# Altium PCB Smart_water_dispenser.PcbDoc
Units mil, origin at the board's own origin, x right, y up, seen from the top; angles counter-clockwise.
Board outline 3966.36 x 2750.41 mil, 2 copper layers (Top Layer, Bottom Layer); 54 components, 41 nets, 185 pads, 16 vias.
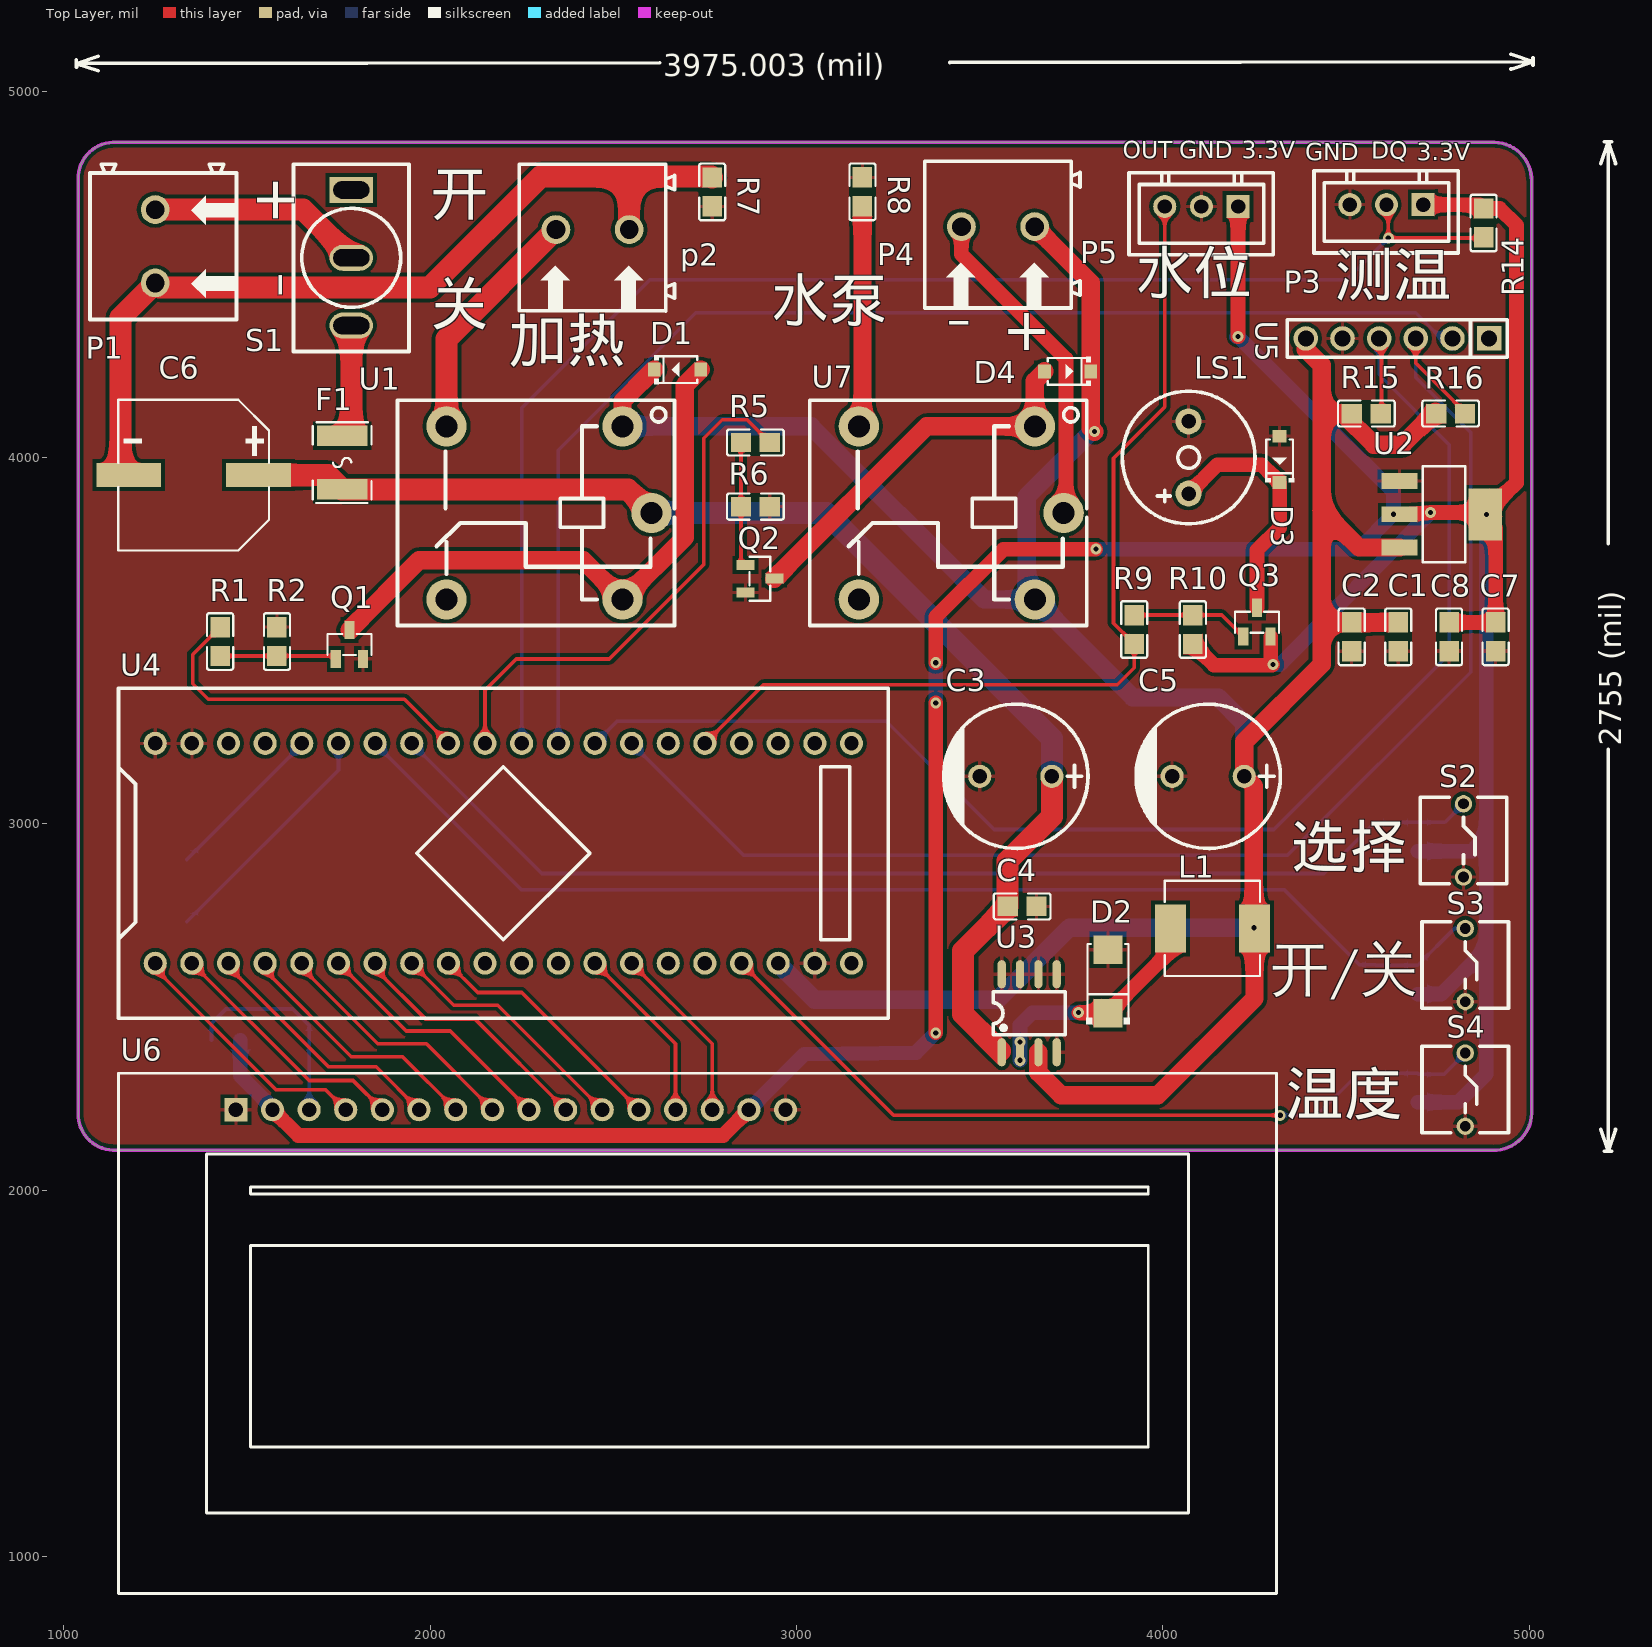
[diagram p0: Top Layer view]
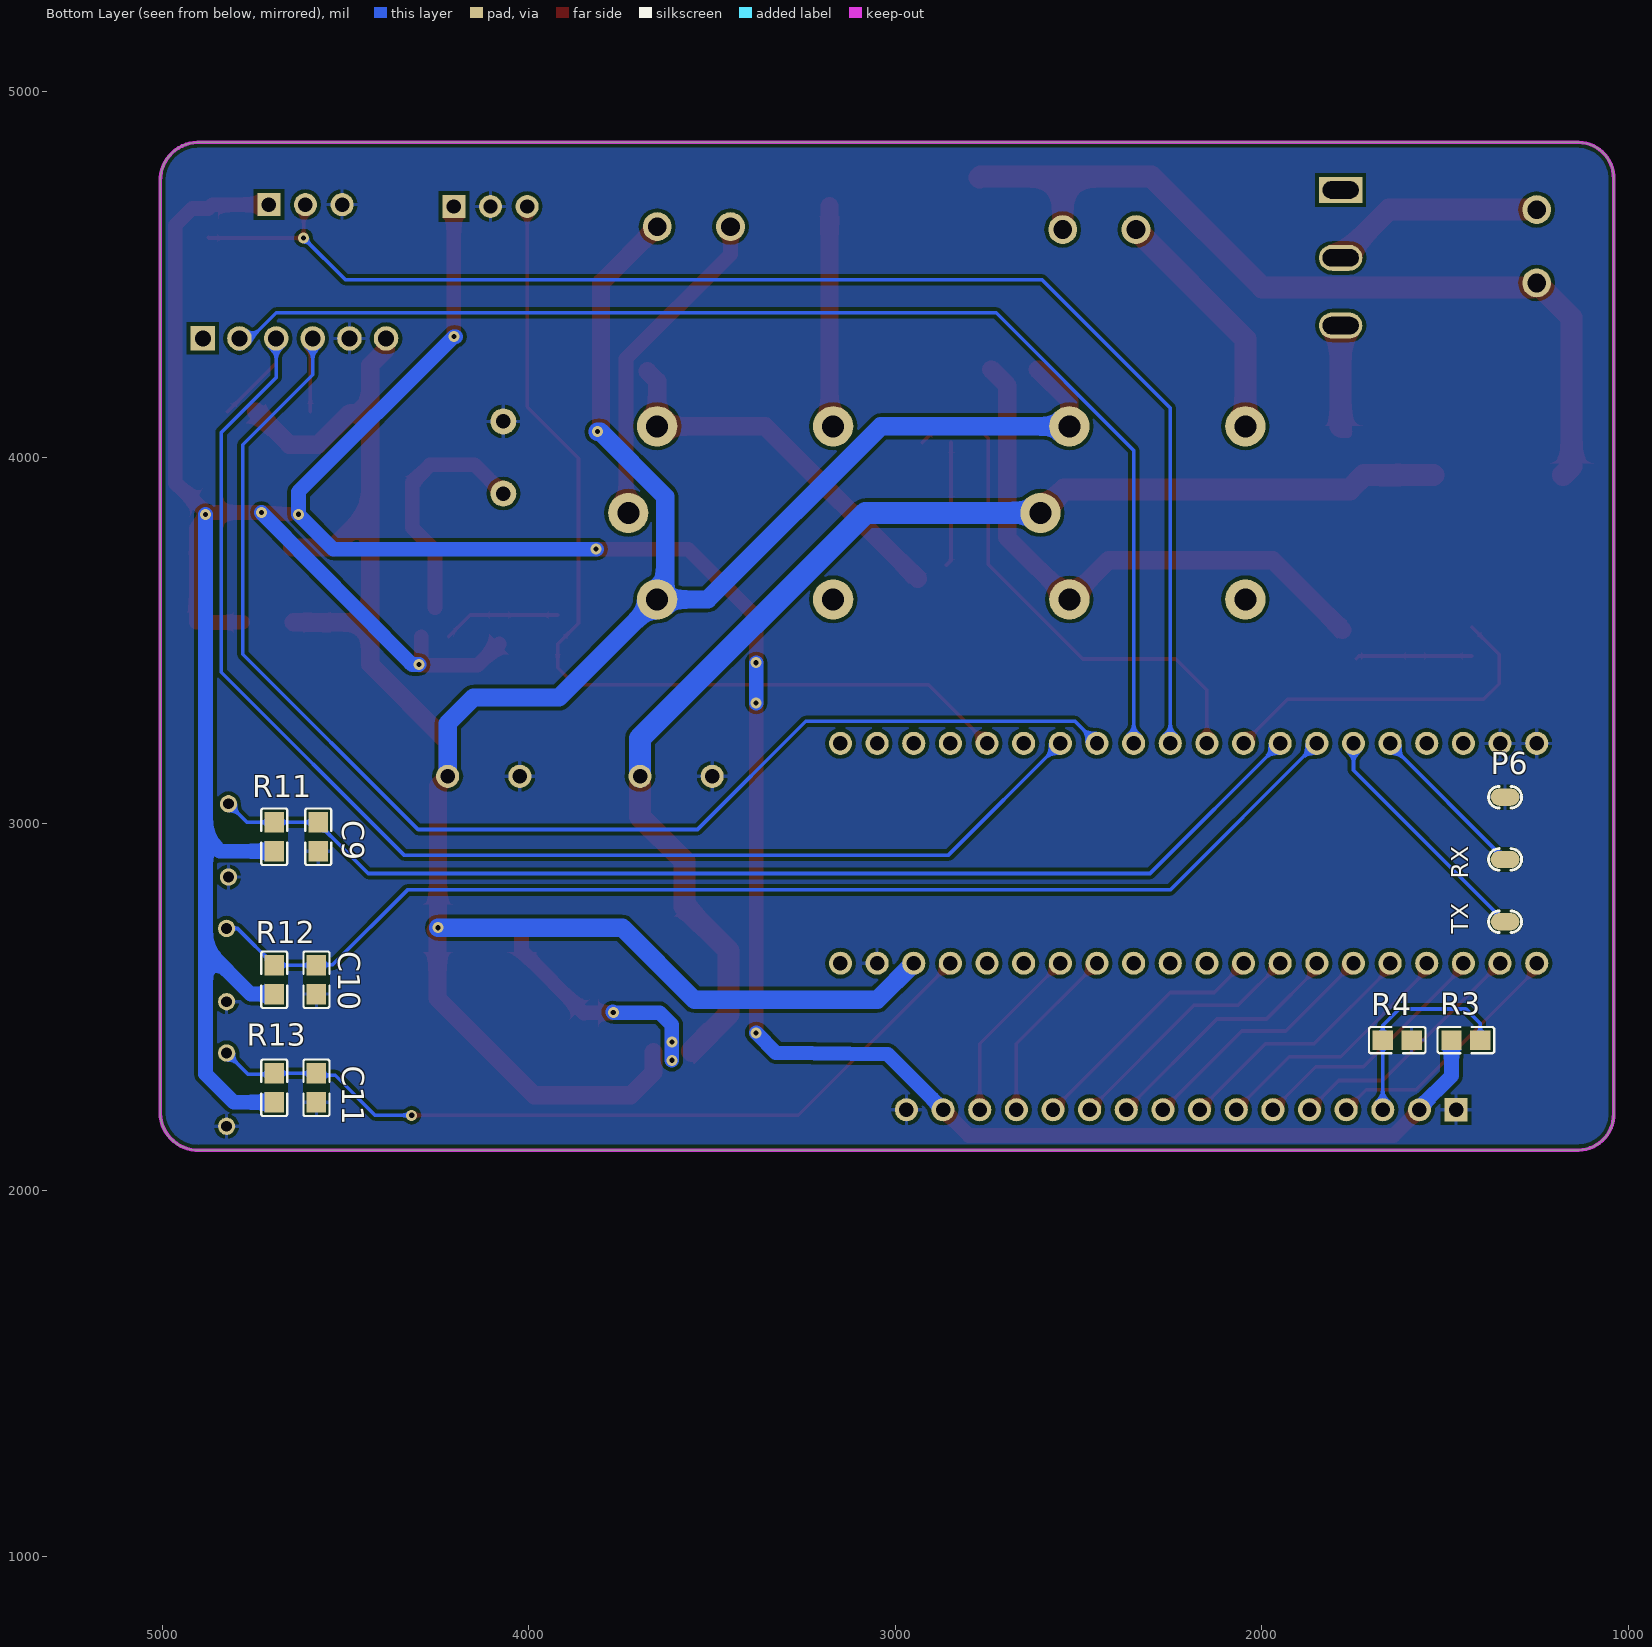
[diagram p1: Bottom Layer view, seen from below]

## Layer stack, top to bottom
Top Solder: solder mask 0.4, Solder Resist, Dk 3.5
Top Layer: signal copper 1.4
Dielectric 1: dielectric 12.6, FR-4, Dk 4.8
Bottom Layer: signal copper 1.4
Bottom Solder: solder mask 0.4, Solder Resist, Dk 3.5

## Board outline
1135,2110 cw(c1137.5,2207.5) 1040,2210 1040,4760 cw(c1137.5,4762.5) 1135,4860 4905,4860 cw(c4902.34,4756.31) 5006.04,4753.65 5006.35,4753.65 5006.35,2210.63 cw(c4902.66,2213.29) 4900,2109.59 4900,2110

## Design rules (kind name [scope] priority, off if disabled: settings)
Clearance [All] p1: gap=10 ignorepadtopadclearanceinfootprint=FALSE except(0: Arc-Hole Track-Hole SMDPad-Hole THPad-Hole Via-Hole Fill-Hole Poly-Hole Region-Hole Text-Hole)
PolygonConnect [All] p1: connectstyle=Relief reliefconductorwidth=10 reliefentries=4 polygonreliefangle="90 Angle" airgapwidth=10
RoutingVias [All] p1: holewidth=28 width=50 viastyle="Through Hole" minholewidth=28 minwidth=50 maxholewidth=28 maxwidth=50
SolderMaskExpansion [All] p1: expansion=4
Width [All] p1: maxlimit=100 minlimit=10 preferedwidth=10
30 further rules are at their usual default settings.

## Components (designator, comment, footprint, x,y, rotation, side; value= is the part's Value field where it differs from the comment)
C1 "Cap" 0805 4642.15,3510.63 r90 top value=10uF
C2 "Cap" 0805 4515,3510.63 r270 top value=0.1uF
C3 "Cap" CAP_TH_BD10 3600,3130 r180 top value=470uF
C4 "Cap" 0805 3615.63,2775 r180 top value=1uF
C5 "Cap" CAP_TH_BD10 4125,3130 r180 top value=180uF
C6 "Cap Pol1" cap_1000uF 1355,3952.13 r180 top value=1000uF
C7 "Cap" 0805 4907.85,3510.63 r270 top value=10uF
C8 "Cap" 0805 4780.7,3510.63 r270 top value=0.1uF
C9 "Cap" 0805 4575,2965 r90 bottom value=100nF
C10 "Cap" 0805 4580,2575 r90 bottom value=100nF
C11 "Cap" 0805 4580,2280 r90 bottom value=100nF
D1 "1N4148" 1N4148 2675,4240 r180 top
D2 "B340A" B340A 3850,2570 r90 top
D3 "1N4148" 1N4148 4318.47,3995 r270 top
D4 "1N4148" 1N4148 3740,4235 r0 top
F1 "Fuse 2" F1812 1760,3984.25 r90 top
L1 "Inductor" IND_CD54 4160,2700 r0 top value=68uH
LS1 "Speaker" buzzer 4070,4000 r90 top
P1 "12V_Terminal Blocks" 2PIN 1250,4576.42 r270 top
p2 "heater" 2PIN 2443.4,4621.99 r180 top
P3 "DS18B20" DS18B20 4610,4690 r180 top
P4 "PUMP" 2PIN 3550,4630 r180 top
P5 "level" DS18B20 4105,4685 r180 top
P6 "DEBUG_UART" DEBUG_UART 1335,2905 r90 bottom
Q1 "S8050" S8050 1780,3490 r270 top
Q2 "S8050" S8050 2900.04,3669.3 r180 top
Q3 "S8550" S8050 4256.54,3550.63 r270 top
R1 "Res2" 0805 1427.12,3497.81 r270 top value=1K
R2 "Res2" 0805 1582.12,3497.81 r270 top value=4.7K
R3 "Res2" 0805 1443.11,2410 r0 bottom value=5K
R4 "Res2" 0805 1630.63,2410 r0 bottom value=5K
R5 "Res2" 0805 2887.71,4040.95 r180 top value=1K
R6 "Res2" 0805 2887.71,3865.95 r180 top value=4.7K
R7 "Res2" 0805 2770,4724.73 r270 top value=0ohm
R8 "Res2" 0805 3180,4725 r90 top value=0ohm
R9 "Res2" 0805 3921.54,3530.63 r90 top value=1K
R10 "Res2" 0805 4081.54,3530.63 r90 top value=4.7K
R11 "Res2" 0805 4695,2965 r90 bottom value=4.7k
R12 "Res2" 0805 4695,2575 r90 bottom value=4.7k
R13 "Res2" 0805 4695,2280 r90 bottom value=4.7k
R14 "Res2" 0805 4875,4640 r90 top value=4.7K
R15 "Res2" 0805 4555,4120 r180 top value=4.7K
R16 "Res2" 0805 4785,4120 r180 top value=4.7K
S1 "SW-SPDT" SW 1785,4545 r270 top
S2 "SW-PB" SW2 4820,2955 r90 top
S3 "SW-PB" SW2 4825,2615 r90 top
S4 "SW-PB" SW2 4825,2275 r90 top
U1 "RELAY_12V" RELAY 2300,3870 r180 top
U2 "AMS1117_3.3" AMS1117 4762.83,3845 r180 top
U3 "XL1509_5.0" XL1509_5.0 3635,2483.5 r0 top
U4 "STM32" STM32 2215,2935 r0 top
U5 "ESP8266" ESP8266 4640,4325 r180 top
U6 "LCD1602" LCD1602 2626.22,1594.51 r0 top
U7 "RELAY_5V" RELAY 3425,3870 r180 top

## Footprints (in the part's own frame and the unit in brackets; to place one, negate y for a bottom-side part, rotate by r counter-clockwise, add the part's x,y. Pads: shape width x height; smd on the part's side, far side on the other; paste and mask are expansions set on the pad)
1N4148 [mm]
  rect 0.88x0.96 smd: 1(-1.61,0) 2(1.61,0)
  silkscreen extent -1.38,-1 1.6,1
2PIN [mm]
  round 2 hole 1.3: 1(-2.54,0) 2(2.54,0)
  silkscreen extent -5.68,-4.52 5.08,5.64
0805 [mm]
  rect 1.41x1.35 smd paste-100 mask+0.051: 1(-1,0) 2(1,0)
  silkscreen extent -1.96,-0.9 1.96,0.9
AMS1117 [mm]
  rect 2.5x1.1 smd: 1(2.97,-2.3) 2(2.97,0) 3(2.97,2.3)
  rect 2.34x3.6 smd: 4(-2.97,0)
  silkscreen extent -1.57,-3.33 1.37,3.33
B340A [mm]
  rect 2x2 smd: 1(-2.2,0) 2(2.2,0)
  silkscreen extent -2.98,-1.5 2.6,1.5
buzzer [mm]
  round 1.8 hole 1 copper offset 0,0: 1(-2.5,0)
  round 1.8 hole 1: 2(2.5,0)
  silkscreen extent -4.6,-4.6 4.6,4.6
cap_1000uF [mm]
  rect 4.5x1.65 smd: 1(-4.5,0) 2(4.5,0)
  silkscreen extent -5.23,-5.23 5.23,5.23
CAP_TH_BD10 [mm]
  round 1.6 hole 1: 1(-2.46,0) 2(2.54,0)
  silkscreen extent -4.96,-5 5.12,5
DEBUG_UART [mm]
  oval 1.2x2 smd: 1(-4.364,0.035) 2(-0.046,0.035) 3(4.272,0.035)
  silkscreen extent -5.11,-1.11 5.02,1.18
DS18B20 [mm]
  rect 1.6x1.6 hole 1: 1(-2.54,0)
  round 1.6 hole 1: 2(0,0) 3(2.54,0)
  silkscreen extent -4.98,-2.35 5.02,3.35
ESP8266 [mm]
  rect 1.7x1.7 hole 1.1: 1(-6.35,0)
  round 1.7 hole 1.1: 2(-3.81,0) 3(-1.27,0) 4(1.27,0) 5(3.81,0) 6(6.35,0)
  silkscreen extent -7.6,-1.3 7.65,1.3
F1812 [mil]
  rect 55.38x137.76 smd paste-3937.01 mask+2: 1(-70.94,0) 2(75,0)
  silkscreen extent -108,-80 112,80
IND_CD54 [mm]
  rect 2.15x3.32 smd: 1(-3.548,0.381) 2(2.278,0.381)
  silkscreen extent -3.94,-2.92 2.67,3.68
LCD1602 [mm]
  rect 1.6x1.6 hole 1: 1(-29.368,15.887)
  round 1.6 hole 1: 2(-26.828,15.887) 3(-24.288,15.887) 4(-21.748,15.887) 5(-19.208,15.887) 6(-16.668,15.887) 7(-14.128,15.887) 8(-11.588,15.887) 9(-9.048,15.887) 10(-6.508,15.887) 11(-3.968,15.887) 12(-1.428,15.887) 13(1.112,15.887) 14(3.652,15.887) 15(6.192,15.887) 16(8.732,15.887)
  silkscreen extent -37.5,-17.65 42.76,18.42
RELAY [mil]
  round 110 hole 60: 1(-225.33,-215.02) 2(255,-215) 3(255,257.4) 4(-225.33,257.42) 5(-304.07,21.2)
  silkscreen extent -367,-286 389,328
S8050 [mm]
  rect 1.25x0.7 smd: 1(1,-0.95) 2(1,0.95) 3(-1,0)
  silkscreen extent -0.73,-1.53 0.73,1.53
STM32 [mm]
  round 1.6 hole 1: 1(-24.511,-8.001) 2(-21.971,-8.001) 3(-19.431,-8.001) 4(-16.891,-8.001) 5(-14.351,-8.001) 6(-11.811,-8.001) 7(-9.271,-8.001) 8(-6.731,-8.001) 9(-4.191,-8.001) 10(-1.651,-8.001) 11(0.889,-8.001) 12(3.429,-8.001) 13(5.969,-8.001) 14(8.509,-8.001) 15(11.049,-8.001) 16(13.589,-8.001) 17(16.129,-8.001) 18(18.669,-8.001) 19(21.209,-8.001) 20(23.749,-8.001) 21(23.749,7.239) 22(21.209,7.239) 23(18.669,7.239) 24(16.129,7.239) 25(13.589,7.239) 26(11.049,7.239) 27(8.509,7.239) 28(5.969,7.239) 29(3.429,7.239) 30(0.889,7.239) 31(-1.651,7.239) 32(-4.191,7.239) 33(-6.731,7.239) 34(-9.271,7.239) 35(-11.811,7.239) 36(-14.351,7.239) 37(-16.891,7.239) 38(-19.431,7.239) 39(-21.971,7.239) 40(-24.511,7.239)
  silkscreen extent -27.05,-11.81 26.29,11.05
SW [mm]
  rect 1.8x3 hole 1.2 slot 2.5 at 90 deg: 1(-4.7,0)
  oval 1.8x3 hole 1.2 slot 2.5 at 90 deg: 2(0,0) 3(4.7,0)
  silkscreen extent -6.48,-4 6.5,4
SW2 [mm]
  round 1.2 hole 0.75: 1(2.54,0) 2(-2.54,0)
  silkscreen extent -3,-3 3,3
XL1509_5.0 [mil]
  oval 22.38x76.78 smd: 1(-75,-106.5) 2(-25,-106.5) 3(25,-106.5) 4(75,-106.5) 5(75,106.5) 6(25,106.5) 7(-25,106.5) 8(-75,106.5)
  silkscreen extent -98,-59 98,59

## Part data
C1 C2 C4 C7 C8 C9 C10 C11: "Capacitor", LatestRevisionDate=17-Jul-2002, LatestRevisionNote="Re-released for DXP Platform.", PackageDescription="Radial Cap, Thru-Hole; 2 Leads; 0.3 in Pin Spacing", PackageReference=RAD-0.3, Published=8-Jun-2000, Publisher="Altium Limited"
C3 C5: library part "Cap Pol1", "Polarized Capacitor (Radial)", LatestRevisionDate=17-Jul-2002, LatestRevisionNote="Re-released for DXP Platform.", PackageDescription="Polarized Capacitor (Radial); 2 Leads", PackageReference=RB7.6-15, Published=8-Jun-2000, Publisher="Altium Limited"
C6: "Polarized Capacitor (Radial)", LatestRevisionDate=17-Jul-2002, LatestRevisionNote="Re-released for DXP Platform.", PackageDescription="Polarized Capacitor (Radial); 2 Leads", PackageReference=RB7.6-15, Published=8-Jun-2000, Publisher="Altium Limited"
D1 D2 D3 D4: library part "D Schottky", "Schottky Diode", Code_JEDEC=DO-214-AA, LatestRevisionDate=17-Jul-2002, LatestRevisionNote="Re-released for DXP Platform.", PackageDescription="DO-214-AA/SMB; 2 C-Bend Leads; Body 5.3 x 3.6 mm, inc. leads (LxW)", PackageReference=SMB, Published=8-Jun-2000, Publisher="Altium Limited"
F1: "Fuse", LatestRevisionDate=17-Jul-2002, LatestRevisionNote="Re-released for DXP Platform.", PackageDescription="Thru-Hole; 2 Leads", PackageReference=PIN-W2/E2.8, Published=8-Jun-2000, Publisher="Altium Limited"
LS1: "Loudspeaker", LatestRevisionDate=17-Jul-2002, LatestRevisionNote="Re-released for DXP Platform.", PackageReference=PIN2, Published=24-Mar-1999, Publisher="Altium Limited"
Q1 Q2: library part 2N3904, "NPN General Purpose Amplifier", ComponentLink1Description="Manufacturer Link", ComponentLink1URL=http://www.fairchildsemi.com/, ComponentLink2Description=Datasheet, ComponentLink2URL=http://www.fairchildsemi.com/ds/2N%2F2N3904.pdf, DatasheetVersion=1997, LatestRevisionDate=15-Jan-2003, LatestRevisionNote="PCB Footprint 'BCY-W3/D4.7' replaced", PackageDescription="TO, Flat Index; 3 In-Line, Axial Leads; Body Dia. 4.5mm; Leads 0.51 x 0.48 mm (max)", PackageReference=TO-92A, PackageVersion=Sep-1998, Published=8-Jun-2000, Publisher="Altium Limited"
Q3: library part 2N3906, "PNP General Purpose Amplifier", ComponentLink1Description="Manufacturer Link", ComponentLink1URL=http://www.fairchildsemi.com/, ComponentLink2Description=Datasheet, ComponentLink2URL=http://www.fairchildsemi.com/ds/2N%2F2N3906.pdf, DatasheetVersion=1997, LatestRevisionDate=15-Jan-2003, LatestRevisionNote="PCB Footprint 'BCY-W3/D4.7' replaced", PackageDescription="TO, Flat Index; 3 In-Line, Axial Leads; Body Dia. 4.5mm; Leads 0.51 x 0.48 mm (max)", PackageReference=TO-92A, PackageVersion=Sep-1998, Published=8-Jun-2000, Publisher="Altium Limited"
R1 R2 R3 R4 R5 R6 R7 R8 R9 R10 R11 R12 R13 R14 R15 R16: "Resistor", LatestRevisionDate=17-Jul-2002, LatestRevisionNote="Re-released for DXP Platform.", PackageDescription="Axial Device, Thru-Hole; 2 Leads; 0.4 in Pin Spacing", PackageReference=AXIAL-0.4, Published=8-Jun-2000, Publisher="Altium Limited"
S1: "SPDT Subminiature Toggle Switch, Right Angle Mounting, Vertical Actuation", ComponentLink1Description="Manufacturer Link", ComponentLink1URL=http://www.apem.com, DatasheetVersion=05-Dec-2000, LatestRevisionDate=17-Dec-2003, LatestRevisionNote="Schematic revised, PCB Footprint replaced.", PackageDescription="Switch; 4 Leads", PackageReference=TL36WW15050, Published=24-Mar-1999, Publisher="Altium Limited"
S2 S3 S4: "Switch", LatestRevisionDate=17-Jul-2002, LatestRevisionNote="Re-released for DXP Platform.", PackageDescription="Switch; 2 Leads", PackageReference=SPST-2, Published=24-Mar-1999, Publisher="Altium Limited"
L1: Code_IEC=1005, Code_JEITA=0402, LatestRevisionDate=29-May-2009, LatestRevisionNote="IPC-7351 Footprint Added.", PackageDescription="Chip Inductor", PackageReference=0402-A, Published=8-Jun-2000, Publisher="Altium Limited"

## Via types
v1: diameter 30, hole 14, Top Layer to Bottom Layer, 16 vias

## Nets (pads, with @x,y where several pads share a name; then routed paths per layer and width w, separated by ;. In a path a pad name is that pad's centre, name@x,y a point inside that pad or via, vN(x,y) a via of type N, cw(c..) or ccw(c..) an arc to the next point about the centre after c; other vN are vias at no path point)
3.3V: C7.1 C8.1 P3.1 P5.1 Q3.2 R3.2 R10.1 R11.1 R12.1 R13.1 R14.2 U2.2 U2.4 U6.2 U6.15 | length 10570.7
  Top Layer w40: U6.2 1640,2150 2800,2150 U6.15 ; v1(3380,2430) v1(3380,3330) ; v1(3380,3440) 3380,3565 3565,3750 v1(3816.85,3750) ; R10.1 4139.48,3433.32 4298.32,3433.32 v1(4300,3435) 4293.94,3441.06 Q3.2 ; v1(4205,4330) P5.1 ; U2.2@4655.91,3845 v1(4730,3849.76) 4879.76,3849.76 4965,3930.24 4965,4633.38 4918.38,4680 4917.75,4679.37 R14.2 4864.37,4690 P3.1 ; C8.1 C7.1 4907.85,3807.34 4886.72,3836.55 4888.34,3838.79 v1(4882.54,3844.59)
  Bottom Layer w40: R3.2 1482.48,2312.93 1570,2225.41 U6.2 ; U6.15 3021.32,2371.32 3325.92,2375.92 v1(3380,2430) ; v1(3380,3330) v1(3380,3440) ; v1@3815,3750 v1(3816.85,3750) 4533.98,3750 v1(4628.98,3845) 4628.98,3906.02 v1(4205,4330) v1@4200.56,4330 ; v1(4300,3435) 4318.65,3435 4323.65,3440 4324.32,3439.32 v1(4730,3849.76) ; R13.1 4805.63,2240.63 4882.54,2317.54 4882.54,2658.98 ; R12.1 4759.19,2535.63 4882.54,2658.98 ; R11.1 4843.17,2925.63 4882.54,2965 ; v1(4882.54,3844.59) 4882.54,2965 ; 4882.54,2658.98 4882.54,2965
5V: C1.2 C2.1 C5.1 D1.2 D4.2 L1.2 P4.1 R15.2 R16.2 U1.1 U2.3 U3.3 U4.18 U5.6 U7.4 | length 8491.2
  Top Layer w50: U1.1 2525.33,4153.72 D1.2 ; P4.1 3803.39,4476.61 D4.2 3803.39,4080 v1(3812.87,4070.52) ; U3.3 3660,2321.85 3721.85,2260 3986.01,2260 4249.68,2523.67 L1.2 ; L1.2@4255,2710 v1(4248.08,2716.92) 4248.08,3103.77 C5.1 4221.85,3224.34 4432.95,3435.45 4432.95,3550 ; U5.6@4390,4295 4432.95,4252.05 4432.95,4120 ; C1.2 C2.1 4432.95,3550 ; U2.3 4535.26,3754.45 4432.95,3856.75 ; R16.2@4743.98,4125 4653.98,4035 4575.52,4035 4490.52,4120 4432.95,4120 ; 4432.95,3550 4432.95,3856.75 ; 4432.95,3856.75 4432.95,4120
  Bottom Layer w50: U1.1 3039.98,4085.02 3512.42,3612.58 U7.4 ; U4.18 3050,2520 3548.43,2520 3745.35,2716.92 v1(4248.08,2716.92) ; v1(3812.87,4070.52) 3805.52,4070.52 3628.28,3893.28 3628.28,3634.63 U7.4 ; C5.1@4221.85,3125 C5.1 4221.85,3274.25 4151.1,3345 3917.91,3345 U7.4
12V_GND: C6.2 P1.2 p2.1 R7.1 | length 2368.7
  Top Layer w60: C6.2 1155,3974.97 1155,4381.42 P1.2 1262.16,4464.26 1999.26,4464.26 2301.42,4766.42 2380,4766.42 2543.4,4766.42 ; p2.1 2543.4,4766.42 ; R7.1 2767.68,4766.42 2543.4,4766.42
8266_RST: U4.29 U5.2 | length 3436.8
  Bottom Layer w10: U4.29 2350,4020 2725,4395 4690,4395 U5.2@4790,4295
8266_RX: R16.1 U4.27 U5.3 | length 3821.1
  Top Layer w10: U5.3 4690,4257.72 R16.1@4822.72,4125
  Bottom Layer w10: U4.27 2855,2915 4340.91,2915 4840,3414.09 4840,4068.35 4690,4218.35 U5.3@4690,4295
8266_TX: R15.1 U4.28 U5.4 | length 3789.5
  Top Layer w10: U5.4 4596.5,4318.5 R15.1@4596.5,4125
  Bottom Layer w10: U4.28 2510,3280 3245,3280 3540,2985 4302.56,2985 4780.9,3463.34 4780.9,4035.01 4590,4225.91 U5.4@4590,4295
DEBUG_RX: P6.2 U4.36 | length 446.7
  Bottom Layer w10: P6.2 1650,3216.81 U4.36
DEBUG_TX: P6.1 U4.35 | length 658.1
  Bottom Layer w10: P6.1 1750,3146.81 U4.35
DQ: P3.2 R14.1 U4.30 | length 3826
  Top Layer w10: P3.2 4615,4685.01 v1(4615,4599) 4873.37,4599 R14.1
  Bottom Layer w10: U4.30 2250,4135 2600,4485 4501,4485 v1(4615,4599)
GND: C1.1 C2.2 C3.2 C4.1 C5.2 C7.2 C8.2 C9.1 C10.1 C11.1 D2.2 D3.1 LS1.2 P3.3 P5.2 P6.3 Q1.2 Q2.2 R2.1 R4.1 R6.1 R7.2 R8.2 S2.2 S3.2 S4.2 U2.1 U3.4 U3.5 U3.6 U3.7 U3.8 U4.19 U4.39 U4.40 U5.5 U6.1 U6.16
KEY1: C9.2 R11.2 S2.1 U4.33 | length 3099.5
  Bottom Layer w10: U4.33 2305,2865 4438.83,2865 4542.21,2968.39 4542.8,2968.39 C9.2@4578.78,3004.36 ; C9.2 R11.2 4695.07,3004.44 4769.44,3004.44 S2.1
KEY2: C10.2 R12.2 S3.1 U4.34 | length 3267.5
  Bottom Layer w10: U4.34 2250,2820 4331.73,2820 4536.06,2615.67 4578.7,2615.67 C10.2 R12.2 4795.63,2715 S3.1
KEY3: C11.2 R13.2 S4.1 U4.17 | length 2222.5
  Top Layer w10: U4.17 3265,2205 v1(4320,2205)
  Bottom Layer w10: v1(4320,2205) 4420,2205 4529.02,2314.02 4580,2314.02 C11.2 R13.2 4697.52,2316.85 4766.85,2316.85 S4.1
LCD_DB0: U4.4 U6.7 | length 697.4
  Top Layer w10: U4.4 1550,2600 1785,2365 1925,2365 U6.7
LCD_DB1: U4.5 U6.8 | length 693
  Top Layer w10: U4.5 1650,2607.6 1857.6,2400 1990,2400 U6.8
LCD_DB2: U4.6 U6.9 | length 685.7
  Top Layer w10: U4.6 1935,2435 2055,2435 U6.9
LCD_DB3: U4.7 U6.10 | length 694.5
  Top Layer w10: U4.7 1850,2605 1987.36,2467.64 2122.36,2467.64 U6.10
LCD_DB4: U4.8 U6.11 | length 685.7
  Top Layer w10: U4.8 2065,2505 2185,2505 U6.11
LCD_DB5: U4.9 U6.12 | length 685.7
  Top Layer w10: U4.9 2130,2540 2250,2540 U6.12
LCD_DB6: U4.13 U6.13 | length 491.1
  Top Layer w10: U4.13 2670,2400 U6.13
LCD_DB7: U4.14 U6.14 | length 491.1
  Top Layer w10: U4.14 2770,2400 U6.14
LCD_E: U4.3 U6.6 | length 691.5
  Top Layer w10: U4.3 1450,2610 1722.87,2337.13 1852.87,2337.13 U6.6
LCD_R/W: U4.2 U6.5 | length 685.7
  Top Layer w10: U4.2 1669.99,2300 1790,2300 U6.5
LCD_RS: U4.1 U6.4 | length 694.7
  Top Layer w10: U4.1 1250,2604.61 1579.61,2275 1715,2275 U6.4
Level: P5.3 R9.1 U4.25 | length 2597
  Top Layer w10: U4.25 2910,3380 3875,3380 3921.54,3426.54 R9.1 3865,3547.8 3865,3998.15 4005,4138.15 P5.3
NetD1_1: D1.1 Q1.3 U1.4 | length 1584.5
  Top Layer w50: Q1.3 1970.63,3720 2417.91,3720 U1.4 2695,3782.25 2695,4196.61 D1.1
NetD2_2: D2.1 L1.1 U3.2 | length 657.1
  Top Layer w40: v1(3770,2485) 3848.38,2485 D2.1 4020.32,2653.7 L1.1
  Bottom Layer w40: v1(3610,2355) 3610,2448.09 3611.73,2449.82 3610,2451.55 3643.45,2485 v1(3770,2485) v1@3771.71,2486.71
  other v1: 3610,2405
NetD3_2: D3.2 LS1.1 Q3.3 | length 668.3
  Top Layer w40: LS1.1 4148.41,3980 4270.08,3980 D3.2 4318.47,3808.47 4256.54,3746.54 Q3.3
NetD4_1: D4.1 Q2.3 U7.1 | length 1044
  Top Layer w50: Q2.3 3355.13,4085.02 U7.1 3650.33,4208.72 D4.1
NetF1_2: F1.2 S1.3 | length 311.1
  Top Layer w10: F1.2 F1.2@1785,4084.25
  Top Layer w60: F1.2@1785,4084.25 S1.3
NetP1_1: P1.1 S1.2 | length 589.4
  Top Layer w60: P1.1 1653.58,4676.42 S1.2
Netp2_2: p2.2 U1.2 | length 660.6
  Top Layer w60: U1.2 2045,4323.59 p2.2
NetP4_2: P4.2 U7.5 | length 902
  Top Layer w40: P4.2 3450,4555 3735.32,4269.68 3735.32,3855.06 U7.5
NetQ1_2: Q1.1 R1.2 R2.2 | length 318.7
  Top Layer w10: R1.2 R2.2 1734.79,3458.44 Q1.1
NetQ2_2: Q2.1 R5.2 R6.2 | length 339.4
  Top Layer w10: R5.2 R6.2 2848.34,3719.03 Q2.1
NetQ3_2: Q3.1 R9.2 R10.2 | length 321.9
  Top Layer w10: R9.2 R10.2 4160.4,3570 Q3.1
pump_DRV: R5.1 U4.31 | length 1455.1
  Top Layer w10: U4.31 2150,3365 2235,3450 2488.84,3450 2746.89,3708.06 2746.89,4052.29 2797.64,4103.03 2865,4103.03 R5.1
pump_GND: R8.1 U7.2 | length 604.8
  Top Layer w50: U7.2 3180,4095 R8.1
RLY_DRV_12V: R1.1 U4.32 | length 950.7
  Top Layer w10: R1.1 1352.13,3462.18 1352.13,3382.87 1395,3340 1930,3340 U4.32
VD: R3.1 R4.2 U6.3 | length 576.8
  Bottom Layer w10: R3.1 1403.74,2455.51 1443.23,2495 1625,2495 1670,2450 R4.2 U6.3
Vin: C3.1 C4.2 C6.1 F1.1 U1.5 U3.1 | length 3456.8
  Top Layer w60: C6.1 1721.18,3952.13 F1.1 2539.56,3913.31 U1.5 ; U3.1@3555,2380.81 3455,2480.81 3455,2653.74 C4.2 3576.26,2899.33 3696.85,3019.92 C3.1
  Bottom Layer w60: U1.5 3081.88,3848.8 3696.85,3233.82 C3.1
pads on no net: S1.1 U1.3 U4.10 U4.11 U4.12 U4.15 U4.16 U4.20 U4.21 U4.22 U4.23 U4.24 U4.26 U4.37 U4.38 U5.1 U7.3

## Polygon pours and split planes (outlines as drawn)
GND on Bottom Layer "GND_L02_P024" (solid, remove dead copper, pour order 24): 1099.95,4861.85 1074.95,4836.85 1064.95,4836.85 1064.95,4831.85 1049.95,4816.85 1049.95,4806.85 1039.95,4796.85 1039.95,4751.85 1039.95,2181.86 1044.95,2176.85 1044.95,2161.85 1084.95,2121.85 1094.95,2121.85 1104.95,2111.85 4929.54,2111.85 4929.95,2111.45 4940.36,2121.85 4954.95,2121.85 4999.95,2166.85 4999.95,2176.85 5006.3,2183.21 5006.3,4782.09 5004.95,4783.45 5004.95,4791.85 4999.95,4796.85 4999.95,4806.85 4989.95,4816.85 4989.95,4821.85 4959.95,4851.85 4939.95,4851.85 4929.95,4861.85
GND on Bottom Layer "GND_L02_P004" (hatched Horizontal grid 20 track 8, remove dead copper, pour order 4): 1005,4900
GND on Top Layer "GND_L01_P026" (solid, remove dead copper, pour order 26): 1099.95,4861.85 1078.6,4840.51 1071.8,4840.51 1071.8,4838.71 1049.95,4816.85 1049.95,4806.85 1039.95,4796.85 1039.95,2201.85 1039.95,2181.86 1044.95,2176.85 1044.95,2167.13 1056.6,2155.48 1056.6,2150.2 1084.95,2121.85 1094.95,2121.85 1104.95,2111.85 4929.54,2111.85 4934.34,2116.65 4949.75,2116.65 4964.95,2131.85 4964.95,2133.24 4970.7,2133.24 4999.95,2162.49 4999.95,2176.85 5006.3,2183.21 5006.3,4782.09 5004.95,4783.45 5004.95,4791.85 4999.95,4796.85 4999.95,4811.85 4966.69,4845.11 4956.69,4845.11 4939.95,4861.85

## Keep-outs
Keep-Out Layer:
  lines w10: 4900,2109.59 ccw(c4902.66,2213.29) 5006.35,2210.63 5006.35,4753.65 ; 4900,2110 1135,2110 cw(c1137.5,2207.5) 1040,2210 1040,4760 cw(c1137.5,4762.5) 1135,4860 4905,4860 cw(c4902.34,4756.31) 5006.04,4753.65

## Silkscreen, mask and mechanical layers (free items; w line width, h text height)
Top Overlay:
  lines w10: 1034.96,5085.08 1034.99,5065.08 ; 1094.95,5095.15 1034.97,5075.08 ; 1095,5055.15 1034.97,5075.08 ; 2626.6,5077.08 1034.97,5075.08 ; 3418.35,5078.07 5009.97,5080.08 ; 4949.95,5100 5009.97,5080.08 ; 4950,5060 5009.97,5080.08 ; 5009.96,5090.08 5009.99,5070.08 ; 5195,2166.6 5215,2106.6 ; 5195,4801.6 5215,4861.6 ; 5205,2106.6 5225,2106.6 ; 5205,4861.6 5225,4861.6 ; 5215,3203.18 5215,2106.6 ; 5215,3765.01 5215,4861.6 ; 5235,2166.6 5215,2106.6 ; 5235,4801.6 5215,4861.6
  text "3975.003 (mil)" at 2636.64,5041.1 h60 r0.07
  text "OUT" at 3890,4800 h80
  text "GND" at 4045,4800 h80
  text "3.3V" at 4215,4800 h80
  text "DQ" at 4567.83,4799.25 h80
  text "GND" at 4387.83,4795 h80
  text "3.3V" at 4692.83,4795 h80
  text "+" at 1490,4635 h200 r270
  text "开" at 2000,4624.12 h200
  text "-" at 1495,4435 h250 r270
  text "水位" at 3925,4410 h200
  text "测温" at 4470,4405 h200
  text "水泵" at 2930,4335 h200
  text "关" at 2000.12,4325 h200
  text "-" at 3480,4270 h250
  text "+" at 3695,4255 h200
  text "加热" at 2215.29,4225 h200
  text "2755 (mil)" at 5250.99,3213.18 h60 r90
  text "选择" at 4350,2844 h200
  text "开/关" at 4293.94,2510 h200
  text "温度" at 4335,2170 h200
Bottom Overlay:
  text "RX" at 1420,2850 h80 r270
  text "TX" at 1420,2700 h80 r270